# EAGLE board Controller PCB v1 (EAGLE 9.6.2)
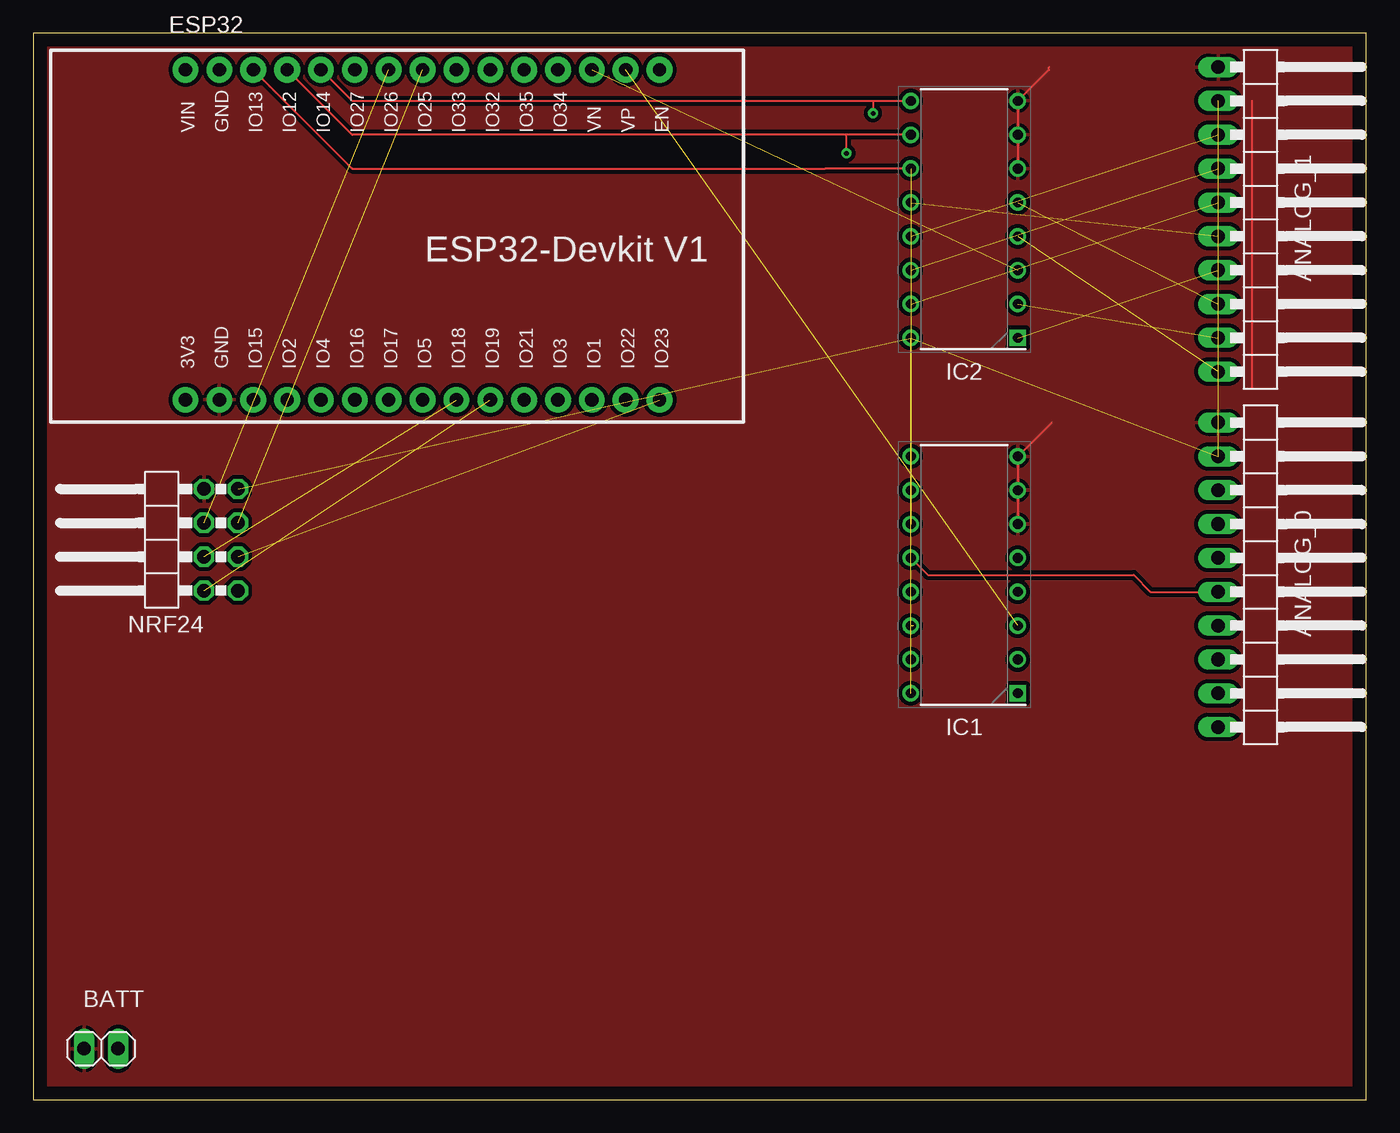
[diagram p0: board, top side]
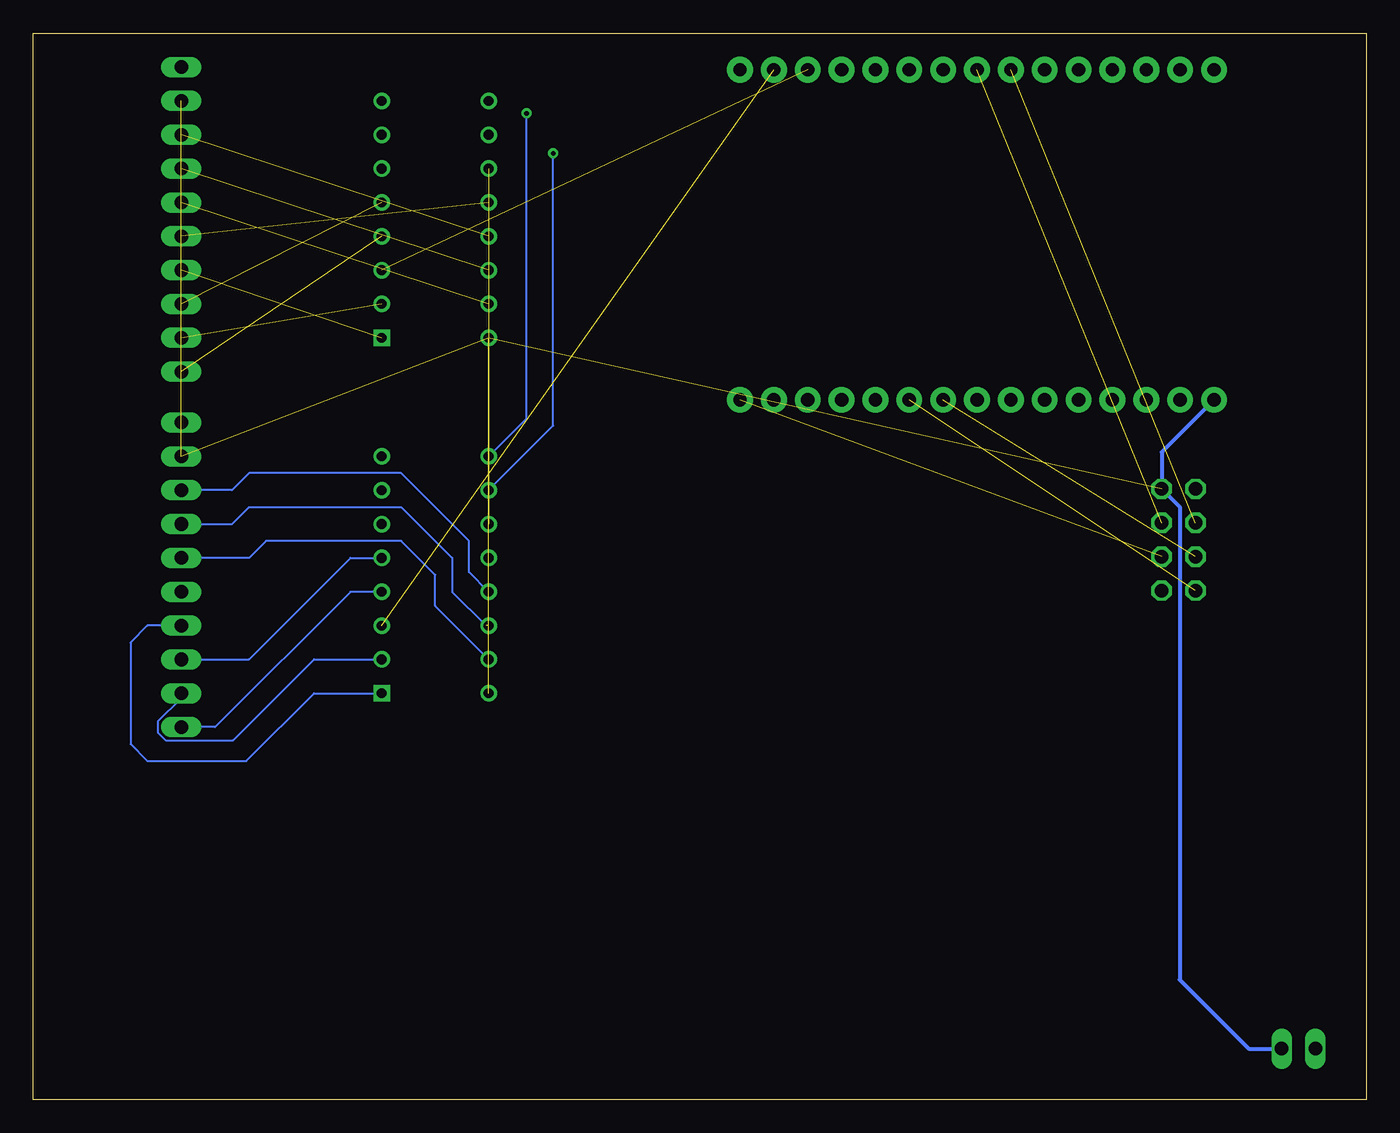
[diagram p1: board, bottom side, seen from below]

Size 100 x 80 mm. Coordinates in mm from the lower left corner, seen from the top.
Outline: 0,0 100,0 100,80 0,80 0,0
Copper layers (1*16): Top 0.035mm / dielectric 1.5mm / Bottom 0.035mm
Design rules "default": minimum track width 6mil, minimum drill 0.35mm, track to track 6mil, track to pad 6mil, pad to pad 6mil, via to via 6mil, smd to smd 6mil, copper to edge 40mil, drill to drill 6mil, minimum pad ring 10mil, minimum via ring 8mil, stop-mask expansion 4mil, vias tented up to drill 0mil, thermal gap 10mil

## Footprints (pad centres in the part's own frame; a part is rotated, then mirrored left to right if it is on the bottom)
1X10/90 = drill 1.016 long: 1 -11.43,-3.81; 2 -8.89,-3.81; 3 -6.35,-3.81; 4 -3.81,-3.81; 5 -1.27,-3.81; 6 1.27,-3.81; 7 3.81,-3.81; 8 6.35,-3.81; 9 8.89,-3.81; 10 11.43,-3.81
1X02 = drill 1.016 long: 1 -1.27,0; 2 1.27,0
ESP32-DEVKITV1 = drill 1 pad 1.93: 1 -22.87,-13.54; 2 -20.33,-13.54; 3 -17.79,-13.54; 4 -15.25,-13.54; 5 -12.71,-13.54; 6 -10.17,-13.54; 7 -7.63,-13.54; 8 -5.09,-13.54; 9 -2.55,-13.54; 10 -0.01,-13.54; 11 2.53,-13.54; 12 5.07,-13.54; 13 7.61,-13.54; 14 10.15,-13.54; 15 12.69,-13.54; 16 12.69,11.23; 17 10.15,11.23; 18 7.61,11.23; 19 5.07,11.23; 20 2.53,11.23; 21 -0.01,11.23; 22 -2.55,11.23; 23 -5.09,11.23; 24 -7.63,11.23; 25 -10.17,11.23; 26 -12.71,11.23; 27 -15.25,11.23; 28 -17.79,11.23; 29 -20.33,11.23; 30 -22.87,11.23
DIP802W53P254L1902H420Q16N = drill 0.73 pad 1.13 square: 1 -4.012,8.89 | drill 0.73 pad 1.13: 2 -4.012,6.35; 3 -4.012,3.81; 4 -4.012,1.27; 5 -4.012,-1.27; 6 -4.012,-3.81; 7 -4.012,-6.35; 8 -4.012,-8.89; 9 4.012,-8.89; 10 4.012,-6.35; 11 4.012,-3.81; 12 4.012,-1.27; 13 4.012,1.27; 14 4.012,3.81; 15 4.012,6.35; 16 4.012,8.89
2X04/90 = drill 1.016 octagon: 1 -3.81,-6.35; 2 -3.81,-3.81; 3 -1.27,-6.35; 4 -1.27,-3.81; 5 1.27,-6.35; 6 1.27,-3.81; 7 3.81,-6.35; 8 3.81,-3.81

## Placement (x,y rotation side)
ANALOG_0  [1X10/90]  92.71,39.37 270 top
ANALOG_1  [1X10/90]  92.71,66.04 270 top
BATT  [1X02]  5.08,3.81 0 top
ESP32  ESP32DEVKITV1  [ESP32-DEVKITV1]  34.29,66.04 0 top
IC1  74HC4051N,652  [DIP802W53P254L1902H420Q16N]  69.85,39.37 180 top
IC2  74HC4051N,652  [DIP802W53P254L1902H420Q16N]  69.85,66.04 180 top
NRF24  [2X04/90]  9,42 90 top

## Library data of the parts
ANALOG_0 ANALOG_1 BATT NRF24 = pinhead
ESP32 = ESP32-DEVKITV1
IC1 IC2 = 74HC4051N_652; DESCRIPTION: 8-channel analog multiplexer/demultiplexer; HEIGHT: 4.2mm; MANUFACTURER_NAME: Nexperia; MANUFACTURER_PART_NUMBER: 74HC4051N,652

## Nets
+3V3: ANALOG_0.2 ANALOG_1.2 BATT.2 ESP32.1 IC1.16 IC2.16 NRF24.7
GND: ANALOG_0.1 ANALOG_1.1 BATT.1 ESP32.2 IC1.6 IC1.7 IC1.8 IC2.6 IC2.7 IC2.8 NRF24.8
IRQ: NRF24.1
MISO: ESP32.10 NRF24.2
MOSI: ESP32.15 NRF24.3
NRF_CE: ESP32.24 NRF24.6
NRF_CSN: ESP32.23 NRF24.5
S_0: ESP32.28 IC1.11 IC2.11
S_1: ESP32.27 IC1.10 IC2.10
S_2: ESP32.26 IC1.9 IC2.9
SCK: ESP32.9 NRF24.4
Y0_0: ANALOG_0.3 IC1.13
Y0_1: ANALOG_0.4 IC1.14
Y0_2: ANALOG_0.5 IC1.15
Y0_3: ANALOG_0.6 IC1.12
Y0_4: ANALOG_0.7 IC1.1
Y0_5: ANALOG_0.8 IC1.5
Y0_6: ANALOG_0.9 IC1.2
Y0_7: ANALOG_0.10 IC1.4
Y0_Z: ESP32.17 IC1.3
Y1_0: ANALOG_1.3 IC2.13
Y1_1: ANALOG_1.4 IC2.14
Y1_2: ANALOG_1.5 IC2.15
Y1_3: ANALOG_1.6 IC2.12
Y1_4: ANALOG_1.7 IC2.1
Y1_5: ANALOG_1.8 IC2.5
Y1_6: ANALOG_1.9 IC2.2
Y1_7: ANALOG_1.10 IC2.4
Y1_Z: ESP32.18 IC2.3

## Tracks (layer width: path | path; a pad name or v marks a point on that pad's centre or on a via)
+3V3  (4 unrouted)
  Bottom 0.305: ESP32.1 15.35,48.57 NRF24.7 14,44.46 14,9 8.81,3.81 BATT.2
GND
  Top 0.152: IC1.6 IC1.7 IC1.8 76.4,50.8 | 91.44,53.34 91.44,74.93 | IC2.6 IC2.7 IC2.8 76.2,77.27 76.2,77.47
  pour Top (isolate 0.305): 0,80.01 60.96,80.01 100.33,80.01 100.33,0 0,0
MISO  (1 unrouted)
MOSI  (1 unrouted)
NRF_CE  (1 unrouted)
NRF_CSN  (1 unrouted)
S_0  (1 unrouted)
  Top 0.152: ESP32.28 23.92,69.85 59.42,69.85 IC2.11
S_1  (via drill 0.35)
  Top 0.152: ESP32.27 23.92,72.39 61,72.39 | IC2.10 61,72.39 | v61,71 61,72.39
  Bottom 0.152: IC1.10 61,50.56 v61,71
S_2  (via drill 0.35)
  Top 0.152: ESP32.26 23.92,74.93 63,74.93 | 63,74.93 IC2.9 | 63,74.93 v63,74
  Bottom 0.152: IC1.9 63,51.1 v63,74
SCK  (1 unrouted)
Y0_0
  Bottom 0.152: IC1.13 67.31,39.57 67.31,41.91 72.39,46.99 83.82,46.99 85.09,45.72 ANALOG_0.3
Y0_1  (1 unrouted)
  Bottom 0.152: ANALOG_0.4 85.09,43.18 83.82,44.45 72.39,44.45 68.58,40.64 68.58,38.1 66.04,35.56
Y0_2
  Bottom 0.152: IC1.15 69.85,37.03 69.85,39.37 72.39,41.91 82.55,41.91 83.82,40.64 ANALOG_0.5
Y0_3
  Top 0.152: IC1.12 67.11,39.37 82.55,39.37 83.82,38.1 ANALOG_0.6
Y0_4
  Bottom 0.152: ANALOG_0.7 91.44,35.56 92.71,34.29 92.71,26.67 91.44,25.4 84.02,25.4 78.94,30.48 IC1.1
Y0_5
  Bottom 0.152: ANALOG_0.8 83.82,33.02 76.2,40.64 IC1.5
Y0_6
  Bottom 0.152: IC1.2 78.94,33.02 85.01,26.95 90.07,26.95 90.65,27.53 90.65,28.35 88.9,30.1 ANALOG_0.9
Y0_7
  Bottom 0.152: IC1.4 76.2,38.1 86.36,27.94 ANALOG_0.10
Y0_Z  (1 unrouted)
Y1_0  (1 unrouted)
Y1_1  (1 unrouted)
Y1_2  (1 unrouted)
Y1_3  (1 unrouted)
Y1_4  (1 unrouted)
Y1_5  (1 unrouted)
Y1_6  (1 unrouted)
Y1_7  (1 unrouted)
Y1_Z  (1 unrouted)